# EAGLE board CFO_nano_protoWithDACandOpAmpMCP4822 (EAGLE 9.2.2)
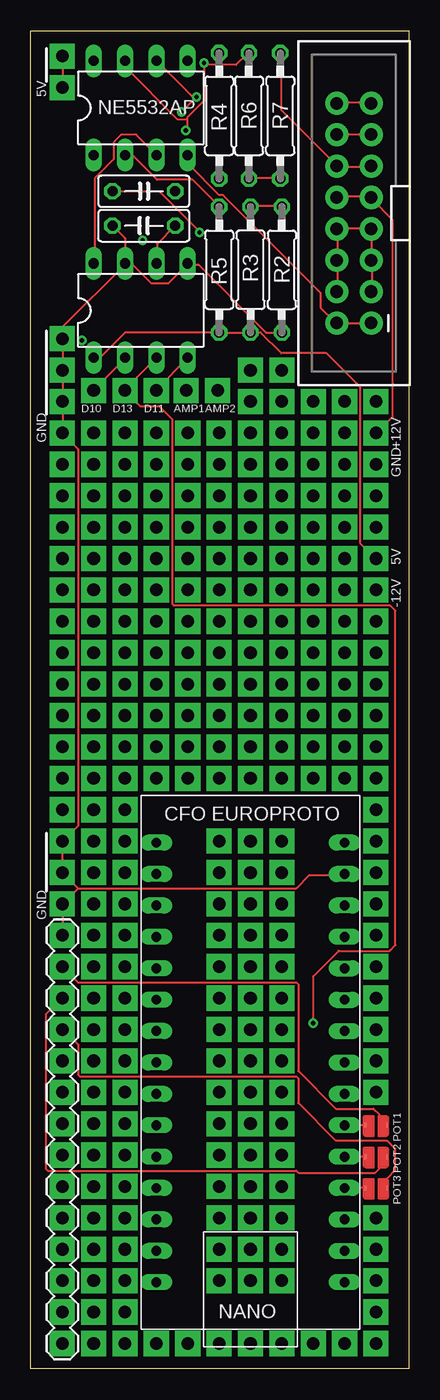
[diagram p0: board, top side]
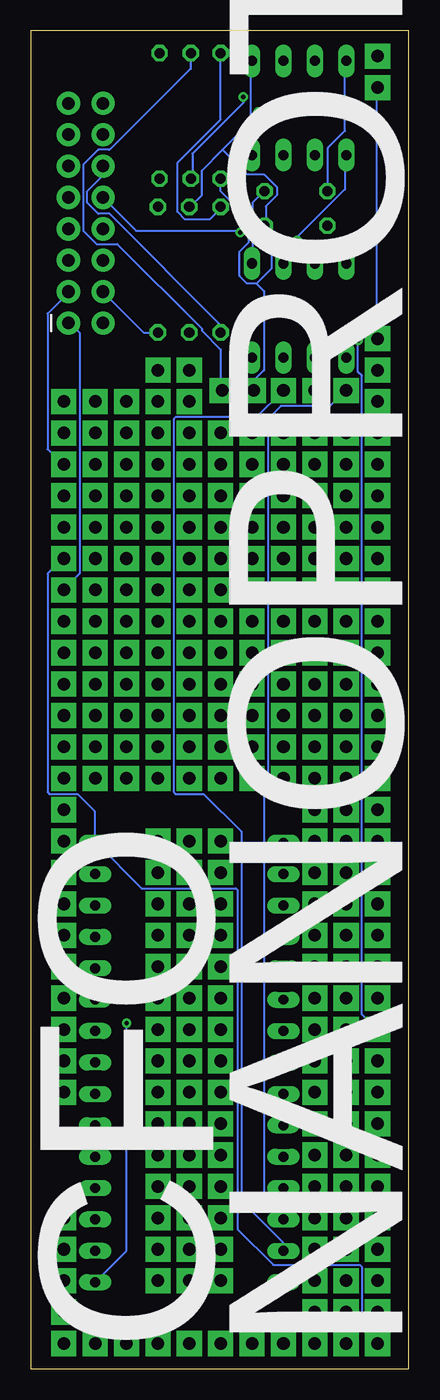
[diagram p1: board, bottom side, seen from below]

Size 30.61 x 108.22 mm. Coordinates in mm from the lower left corner, seen from the top.
Outline: 30.61,0 0,0 0,108.22 30.61,108.22 30.61,0
Copper layers (1*16): Top 0.035mm / dielectric 1.5mm / Bottom 0.035mm
Design rules "default": minimum track width 6mil, minimum drill 0.35mm, track to track 6mil, track to pad 6mil, pad to pad 6mil, via to via 6mil, smd to smd 6mil, copper to edge 40mil, drill to drill 6mil, minimum pad ring 10mil, minimum via ring 8mil, stop-mask expansion 4mil, vias tented up to drill 0mil, thermal gap 10mil

## Footprints (pad centres in the part's own frame; a part is rotated, then mirrored left to right if it is on the bottom)
C050-025X075 = drill 0.813 octagon: 1 -2.54,0; 2 2.54,0
1X01 = drill 1.016 pad 2.032 square: 1 0,0
1X04 = drill 1.016 pad 2.032 square: 1 0,0; 2 2.54,0; 3 5.08,0; 4 7.62,0
1X14 = drill 1.016 pad 2.032 square: 1 0,0; 2 2.54,0; 3 5.08,0; 4 7.62,0; 5 10.16,0; 6 12.7,0; 7 15.24,0; 8 17.78,0; 9 20.32,0; 10 22.86,0; 11 25.4,0; 12 27.94,0; 13 30.48,0; 14 33.02,0
2X8-SHROUDED_LOCK = drill 1.016 pad 1.88: 1 -1.397,8.89; 2 1.397,8.89; 3 -1.397,6.35; 4 1.397,6.35; 5 -1.397,3.81; 6 1.397,3.81; 7 -1.397,1.27; 8 1.397,1.27; 9 -1.397,-1.27; 10 1.397,-1.27; 11 -1.397,-3.81; 12 1.397,-3.81; 13 -1.397,-6.35; 14 1.397,-6.35; 15 -1.397,-8.89; 16 1.397,-8.89
DIL08 = drill 0.813 long: 1 -3.81,-3.81; 2 -1.27,-3.81; 3 1.27,-3.81; 4 3.81,-3.81; 5 3.81,3.81; 6 1.27,3.81; 7 -1.27,3.81; 8 -3.81,3.81
SMT-JUMPER_2_NO_NO-SILK_ROUND = smd 0.152 x 0.305: 1 -0.889,0; 2 0.889,0
0207/10 = drill 0.813 octagon: 1 -5.08,0; 2 5.08,0
NANO = drill 0.8 long: 3.3V -7.62,15.24; 5V -7.62,-10.16; A0 -7.62,10.16; A1 -7.62,7.62; A2 -7.62,5.08; A3 -7.62,2.54; A4 -7.62,0; A5 -7.62,-2.54; A6 -7.62,-5.08; A7 -7.62,-7.62; AREF -7.62,12.7; D2 7.62,-7.62; D3 7.62,-5.08; D4 7.62,-2.54; D5 7.62,0; D6 7.62,2.54; D7 7.62,5.08; D8 7.62,7.62; D9 7.62,10.16; D10 7.62,12.7; D11 7.62,15.24; D12 7.62,17.78; D13 -7.62,17.78; GND -7.62,-15.24; GND1 7.62,-10.16; RST -7.62,-12.7; RST1 7.62,-12.7; RX0 7.62,-15.24; TX1 7.62,-17.78; VIN -7.62,-17.78

## Placement (x,y rotation side)
C5  100n  [C050-025X075]  9.14,92.46 180 top
C6  100n  [C050-025X075]  9.14,95.25 0 top
CVOUT1  [1X01]  12.57,79.12 0 top
CVOUT2  [1X01]  15.11,79.12 0 top
D1  [1X01]  27.94,62.99 0 top
D2  [1X01]  27.94,75.69 0 top
D10  [1X01]  5.08,79.12 0 top
D11  [1X01]  10.16,79.12 0 top
D13  [1X01]  7.62,79.12 0 top
J1  [1X04]  27.94,73.15 270 top
J2  [1X14]  2.54,35.05 270 top
J3  [2X8-SHROUDED_LOCK]  26.16,93.47 180 top
J4  [1X01]  2.54,106.17 0 top
J5  [1X01]  2.54,103.63 0 top
J28  [1X01]  2.54,83.31 0 top
J29  [1X01]  2.54,42.67 0 top
J31  [1X01]  2.54,80.77 0 top
J34  [1X01]  2.54,78.23 0 top
J37  [1X01]  2.54,75.69 0 top
J39  [1X01]  2.54,40.13 0 top
J42  [1X01]  2.54,37.59 0 top
NE5532AP  [DIL08]  8.89,101.98 0 top
POT1  JUMPERCFO  [SMT-JUMPER_2_NO_NO-SILK_ROUND]  27.94,19.68 180 top
POT2  JUMPERCFO  [SMT-JUMPER_2_NO_NO-SILK_ROUND]  27.94,17.14 180 top
POT3  JUMPERCFO  [SMT-JUMPER_2_NO_NO-SILK_ROUND]  27.94,14.61 180 top
R2  10k  [0207/10]  20.32,88.9 270 top
R3  10k  [0207/10]  17.78,88.9 90 top
R4  10k  [0207/10]  15.24,101.35 270 top
R5  10k  [0207/10]  15.24,88.9 270 top
R6  10k  [0207/10]  17.65,101.35 270 top
R7  10k  [0207/10]  20.19,101.35 270 top
U$1  MCP4921  [DIL08]  8.89,85.6 0 top
U$2  NANO  [NANO]  17.78,24.77 180 top

## Library data of the parts
C5 C6 = rcl; SPICEPREFIX: C
CVOUT1 CVOUT2 D1 D2 D10 D11 D13 J3-J5 J28 J29 J31 J34 J37 J39 J42 POT1-POT3 U$2 = CFO
J1 = CFO; PROD_ID: CONN-09696; SPICEPREFIX: E
J2 = CFO; SPICEPREFIX: X
NE5532AP = ic-package
R2-R7 = rcl; SPICEPREFIX: R
U$1 = adafruit

## Nets
5V: J1.4 J2.14 J3.11 J3.12 J4.1 J5.1 R3.1 R5.2 R7.1 U$1.1 U$2.VIN
12V: C6.1 D2.1 J3.9 J3.10 NE5532AP.8
A0: POT3.2 U$2.A0
A1: POT2.2 U$2.A1
A2: POT1.2 U$2.A2
CV: J3.13 J3.14
CV1: NE5532AP.3 U$1.8
CV2: C5.1 NE5532AP.5 R2.1 R3.2 U$1.6
CVOUT1: CVOUT1.1 NE5532AP.1 R4.2
CVOUT2: CVOUT2.1 NE5532AP.7 R6.1
D10: D10.1 U$1.2 U$2.D10
D11: D11.1 U$1.4 U$2.D11
D13: D13.1 U$1.3 U$2.D13
GATE: J3.15 J3.16
GND: C5.2 C6.2 J1.1 J2.1 J3.3 J3.4 J3.5 J3.6 J3.7 J3.8 J28.1 J29.1 J31.1 J34.1 J37.1 J39.1 J42.1 R2.2 U$1.5 U$1.7 U$2.GND
N$2: NE5532AP.6 R6.2 R7.2
N$4: NE5532AP.2 R4.1 R5.1
N$185: J1.3
N$186: J1.2
POT1: J2.2 POT1.1
POT2: J2.3 POT2.1
POT3: J2.4 POT3.1
VEE: D1.1 J3.1 J3.2 NE5532AP.4

## Tracks (layer width: path | path; a pad name or v marks a point on that pad's centre or on a via)
5V
  Top 0.152: R7.1 20.27,106.38 20.27,101.8 24.69,97.38 J3.12 24.84,97.23 27.43,97.23 J3.11 | J5.1 2.59,103.63 2.59,106.07 J4.1 | U$1.1 5.18,81.84 5.64,81.84 7.62,83.82 R5.2 R3.1 18.59,83.82 20.27,82.14 23.93,82.14 26.67,79.4 26.67,66.75 27.89,65.53 J1.4
  Bottom 0.152: J5.1 2.59,103.63 2.59,85.65 5.03,83.21 5.03,81.84 U$1.1 | R5.2 15.24,84.43 24.23,93.42 25.15,93.42 26.06,94.34 26.06,95.25 24.84,96.47 24.84,97.23 J3.12 | J1.4 28.04,65.53 29.26,64.31 29.26,46.63 29.11,46.48 26.82,46.48 25.45,45.11 25.45,42.67 U$2.VIN 25.3,42.52 21.64,38.86 14.02,38.86 13.87,38.71 13.87,11.28 10.97,8.38 3.96,8.38 3.81,8.23 3.81,3.35 2.59,2.13 J2.14
12V  (via drill 0.35)
  Top 0.152: C6.1 10.36,95.25 13.56,92.05 v13.65,91.92 | J3.10 24.84,94.79 27.43,94.79 J3.9 27.58,94.64 29.26,92.96 29.26,76.96 28.04,75.74 D2.1
  Bottom 0.152: NE5532AP.8 5.18,105.77 5.18,100.13 6.55,98.75 6.55,95.25 C6.1 | v13.65,91.92 13.72,92.05 22.1,92.05 24.69,94.64 J3.10
A0
  Top 0.152: POT3.2 U$2.A0
A1
  Top 0.152: POT2.2 U$2.A1
A2
  Top 0.152: POT1.2 U$2.A2
CV
  Top 0.152: J3.13 J3.14
CV1
  Top 0.152: U$1.8 5.18,89.46 5.18,96.32 6.71,97.84 6.71,99.21 7.32,99.82 8.53,99.82 10.06,98.3 NE5532AP.3
CV2
  Top 0.152: C5.1 10.21,90.98 10.21,89.46 U$1.6 | R3.2 17.83,94.03 20.27,94.03 R2.1
  Bottom 0.152: 15.09,98.6 16.76,96.93 16.76,94.94 17.68,94.03 R3.2 | 15.09,98.6 12.8,100.89 12.8,105.77 NE5532AP.5 | 15.09,98.6 13.11,96.62 11.73,96.62 10.67,95.56 10.67,94.94 11.58,94.03 11.58,92.51 C5.1
CVOUT1  (via drill 0.35)
  Bottom 0.152: NE5532AP.1 5.18,98.15 5.18,95.4 8.99,91.59 8.99,91.29 v9.05,91.28 9.14,91.14 10.36,91.14 11.12,90.37 11.12,89 12.34,87.78 | R4.2 15.24,95.25 12.95,92.96 12.95,91.14 13.72,90.37 13.72,88.39 13.11,87.78 12.34,87.78 | 12.34,87.78 11.73,87.17 11.73,80.77 12.5,80.01 12.5,79.25 CVOUT1.1
CVOUT2  (via drill 0.35)
  Top 0.152: 12.65,101.04 12.65,101.19 14.02,102.56 14.02,105.46 | 12.65,101.04 12.65,100.28 v12.54,100.17 | 14.02,105.46 16.61,105.46 17.53,106.38 R6.1 | 14.02,105.46 v14.02,105.61 | NE5532AP.7 7.62,105.31 11.89,101.04 12.65,101.04
  Bottom 0.152: CVOUT2.1 15.24,79.25 15.24,82.45 16.76,83.97 16.76,84.12 23.62,90.98 25.3,90.98 26.36,92.05 26.36,97.38 25.15,98.6 24.23,98.6 17.68,105.16 17.68,106.38 R6.1
D10
  Top 0.152: U$1.2 7.62,81.69 5.18,79.25 D10.1
  Bottom 0.152: U$2.D10 10.21,12.19 10.21,12.65 11.73,14.17 11.73,46.33 11.43,46.63 11.43,76.81 10.36,77.88 6.4,77.88 5.18,79.1 D10.1
D11
  Top 0.152: U$1.4 12.65,81.69 10.21,79.25 D11.1
  Bottom 0.152: U$2.D11 10.21,9.6 10.21,10.21 13.56,13.56 13.56,43.43 16.61,46.48 18.9,46.48 19.05,46.63 19.05,76.81 18.9,76.96 12.34,76.96 10.21,79.1 D11.1
D13  (via drill 0.35)
  Top 0.152: U$1.3 7.62,79.25 D13.1 7.62,79.1 8.84,77.88 10.36,77.88 11.43,76.81 11.43,61.87 11.58,61.72 29.11,61.72 29.51,61.32 29.51,34.27 29.05,33.81 24.92,33.81 22.86,31.75 v22.86,27.94
  Bottom 0.152: U$2.D13 22.86,9.53 v22.86,27.94
GATE
  Top 0.152: J3.16 24.84,102.41 27.43,102.41 J3.15
GND
  Top 0.152: J2.1 2.59,35.05 2.59,37.49 J42.1 3.81,38.86 | 3.81,38.86 21.49,38.86 22.55,39.93 25.3,39.93 U$2.GND | 3.81,38.86 J39.1 2.59,40.23 2.59,42.67 | J3.4 24.84,87.17 24.84,89.61 J3.6 24.84,89.76 24.84,92.2 | J3.3 27.58,87.17 27.58,89.61 J3.5 27.58,89.76 27.58,92.2 J3.7 24.84,92.2 | 24.84,92.2 J3.8 | 2.59,80.77 2.59,83.21 J28.1 2.59,83.36 2.59,84.28 7.62,89.31 | 2.59,80.77 2.59,78.33 J34.1 2.59,78.18 2.59,75.74 J37.1 2.59,75.59 3.81,74.37 3.81,43.89 2.59,42.67 | 2.59,80.77 J31.1 | C5.2 7.62,91.44 U$1.7 7.62,89.31 | 7.62,89.31 8.23,89.31 9.75,87.78 11.12,87.78 12.65,89.31 U$1.5 12.8,89.31 13.56,89.31 19.05,83.82 R2.2 | 2.59,42.67 J29.1
  Bottom 0.152: R2.2 21.49,83.82 24.69,87.02 J3.4 | J1.1 28.04,73.15 29.26,74.37 29.26,85.34 27.58,87.02 J3.3 | U$1.5 12.65,89.46 12.65,94.34 11.73,95.25 C6.2
N$1  (via drill 1.02 pad 2.03)
  other vias: 27.94,50.29
N$2  (via drill 0.35)
  Top 0.152: R6.2 17.68,96.32 20.12,96.32 R7.2 | 13.26,102.72 v12.19,101.65 | 13.26,102.72 10.21,105.77 NE5532AP.6 | 13.26,102.72 v13.41,102.87
  Bottom 0.152: v13.41,102.87 13.41,102.41 17.53,98.3 17.53,96.32 R6.2
N$3  (via drill 1.02 pad 2.03)
  other vias: 5.08,2.03
N$4
  Top 0.152: NE5532AP.2 7.62,98.15 8.23,98.15 10.21,96.16 13.11,96.16 15.24,94.03 R5.1
  Bottom 0.152: R4.1 15.24,101.04 18.75,97.54 18.75,93.57 18.14,92.96 16.15,92.96 15.24,93.88 R5.1
N$5  (via drill 1.02 pad 2.03)
  other vias: 7.62,2.03
N$6  (via drill 1.02 pad 2.03)
  other vias: 10.16,2.03
N$7  (via drill 1.02 pad 2.03)
  other vias: 10.16,47.75
N$8  (via drill 1.02 pad 2.03)
  other vias: 7.62,4.57
N$9  (via drill 1.02 pad 2.03)
  other vias: 27.94,47.75
N$10  (via drill 1.02 pad 2.03)
  other vias: 5.08,4.57
N$11  (via drill 1.02 pad 2.03)
  other vias: 5.08,7.11
N$12  (via drill 1.02 pad 2.03)
  other vias: 7.62,7.11
N$13  (via drill 1.02 pad 2.03)
  other vias: 10.16,50.29
N$14  (via drill 1.02 pad 2.03)
  other vias: 10.16,52.83
N$15  (via drill 1.02 pad 2.03)
  other vias: 7.62,9.65
N$16  (via drill 1.02 pad 2.03)
  other vias: 5.08,9.65
N$17  (via drill 1.02 pad 2.03)
  other vias: 5.08,12.19
N$18  (via drill 1.02 pad 2.03)
  other vias: 7.62,12.19
N$19  (via drill 1.02 pad 2.03)
  other vias: 10.16,55.37
N$20  (via drill 1.02 pad 2.03)
  other vias: 10.16,57.91
N$21  (via drill 1.02 pad 2.03)
  other vias: 7.62,14.73
N$22  (via drill 1.02 pad 2.03)
  other vias: 5.08,14.73
N$23  (via drill 1.02 pad 2.03)
  other vias: 5.08,17.27
N$24  (via drill 1.02 pad 2.03)
  other vias: 7.62,17.27
N$25  (via drill 1.02 pad 2.03)
  other vias: 10.16,60.45
N$27  (via drill 1.02 pad 2.03)
  other vias: 7.62,19.81
N$28  (via drill 1.02 pad 2.03)
  other vias: 5.08,19.81
N$29  (via drill 1.02 pad 2.03)
  other vias: 5.08,22.35
N$30  (via drill 1.02 pad 2.03)
  other vias: 7.62,22.35
N$33  (via drill 1.02 pad 2.03)
  other vias: 7.62,24.89
N$34  (via drill 1.02 pad 2.03)
  other vias: 5.08,24.89
N$35  (via drill 1.02 pad 2.03)
  other vias: 5.08,27.43
N$36  (via drill 1.02 pad 2.03)
  other vias: 7.62,27.43
N$39  (via drill 1.02 pad 2.03)
  other vias: 7.62,29.97
N$40  (via drill 1.02 pad 2.03)
  other vias: 5.08,29.97
N$41  (via drill 1.02 pad 2.03)
  other vias: 5.08,32.51
N$42  (via drill 1.02 pad 2.03)
  other vias: 7.62,32.51
N$45  (via drill 1.02 pad 2.03)
  other vias: 7.62,35.05
N$46  (via drill 1.02 pad 2.03)
  other vias: 5.08,35.05
N$47  (via drill 1.02 pad 2.03)
  other vias: 5.08,37.59
N$48  (via drill 1.02 pad 2.03)
  other vias: 7.62,37.59
N$51  (via drill 1.02 pad 2.03)
  other vias: 7.62,40.13
N$52  (via drill 1.02 pad 2.03)
  other vias: 5.08,40.13
N$53  (via drill 1.02 pad 2.03)
  other vias: 5.08,42.67
N$54  (via drill 1.02 pad 2.03)
  other vias: 7.62,42.67
N$57  (via drill 1.02 pad 2.03)
  other vias: 7.62,45.21
N$58  (via drill 1.02 pad 2.03)
  other vias: 5.08,45.21
N$59  (via drill 1.02 pad 2.03)
  other vias: 2.54,45.21
N$60  (via drill 1.02 pad 2.03)
  other vias: 2.54,47.75
N$61  (via drill 1.02 pad 2.03)
  other vias: 5.08,47.75
N$62  (via drill 1.02 pad 2.03)
  other vias: 7.62,47.75
N$65  (via drill 1.02 pad 2.03)
  other vias: 7.62,50.29
N$66  (via drill 1.02 pad 2.03)
  other vias: 5.08,50.29
N$67  (via drill 1.02 pad 2.03)
  other vias: 2.54,50.29
N$68  (via drill 1.02 pad 2.03)
  other vias: 22.86,60.45
N$69  (via drill 1.02 pad 2.03)
  other vias: 22.86,57.91
N$70  (via drill 1.02 pad 2.03)
  other vias: 25.4,57.91
N$71  (via drill 1.02 pad 2.03)
  other vias: 25.4,60.45
N$83  (via drill 1.02 pad 2.03)
  other vias: 5.08,75.69
N$88  (via drill 1.02 pad 2.03)
  other vias: 27.94,22.35
N$93  (via drill 1.02 pad 2.03)
  other vias: 27.94,24.89
N$94  (via drill 1.02 pad 2.03)
  other vias: 27.94,27.43
N$99  (via drill 1.02 pad 2.03)
  other vias: 27.94,29.97
N$100  (via drill 1.02 pad 2.03)
  other vias: 27.94,32.51
N$105  (via drill 1.02 pad 2.03)
  other vias: 27.94,35.05
N$106  (via drill 1.02 pad 2.03)
  other vias: 25.4,55.37
N$107  (via drill 1.02 pad 2.03)
  other vias: 25.4,52.83
N$108  (via drill 1.02 pad 2.03)
  other vias: 12.7,60.45
N$109  (via drill 1.02 pad 2.03)
  other vias: 15.24,60.45
N$110  (via drill 1.02 pad 2.03)
  other vias: 17.78,60.45
N$112  (via drill 1.02 pad 2.03)
  other vias: 15.24,35.05
N$113  (via drill 1.02 pad 2.03)
  other vias: 17.78,35.05
N$114  (via drill 1.02 pad 2.03)
  other vias: 20.32,35.05
N$115  (via drill 1.02 pad 2.03)
  other vias: 20.32,32.51
N$116  (via drill 1.02 pad 2.03)
  other vias: 17.78,32.51
N$117  (via drill 1.02 pad 2.03)
  other vias: 15.24,32.51
N$119  (via drill 1.02 pad 2.03)
  other vias: 17.78,57.91
N$120  (via drill 1.02 pad 2.03)
  other vias: 15.24,57.91
N$121  (via drill 1.02 pad 2.03)
  other vias: 12.7,57.91
N$122  (via drill 1.02 pad 2.03)
  other vias: 12.7,55.37
N$123  (via drill 1.02 pad 2.03)
  other vias: 15.24,55.37
N$124  (via drill 1.02 pad 2.03)
  other vias: 17.78,55.37
N$126  (via drill 1.02 pad 2.03)
  other vias: 15.24,29.97
N$127  (via drill 1.02 pad 2.03)
  other vias: 17.78,29.97
N$128  (via drill 1.02 pad 2.03)
  other vias: 20.32,29.97
N$130  (via drill 1.02 pad 2.03)
  other vias: 12.7,50.29
N$131  (via drill 1.02 pad 2.03)
  other vias: 12.7,52.83
N$133  (via drill 1.02 pad 2.03)
  other vias: 15.24,52.83
N$134  (via drill 1.02 pad 2.03)
  other vias: 17.78,52.83
N$136  (via drill 1.02 pad 2.03)
  other vias: 15.24,27.43
N$137  (via drill 1.02 pad 2.03)
  other vias: 17.78,27.43
N$138  (via drill 1.02 pad 2.03)
  other vias: 20.32,27.43
N$139  (via drill 1.02 pad 2.03)
  other vias: 20.32,24.89
N$140  (via drill 1.02 pad 2.03)
  other vias: 17.78,24.89
N$141  (via drill 1.02 pad 2.03)
  other vias: 15.24,24.89
N$143  (via drill 1.02 pad 2.03)
  other vias: 17.78,50.29
N$144  (via drill 1.02 pad 2.03)
  other vias: 15.24,50.29
N$145  (via drill 1.02 pad 2.03)
  other vias: 27.94,9.65
N$146  (via drill 1.02 pad 2.03)
  other vias: 27.94,12.19
N$147  (via drill 1.02 pad 2.03)
  other vias: 12.7,47.75
N$148  (via drill 1.02 pad 2.03)
  other vias: 15.24,47.75
N$149  (via drill 1.02 pad 2.03)
  other vias: 17.78,47.75
N$151  (via drill 1.02 pad 2.03)
  other vias: 15.24,22.35
N$152  (via drill 1.02 pad 2.03)
  other vias: 17.78,22.35
N$153  (via drill 1.02 pad 2.03)
  other vias: 20.32,22.35
N$154  (via drill 1.02 pad 2.03)
  other vias: 20.32,19.81
N$155  (via drill 1.02 pad 2.03)
  other vias: 17.78,19.81
N$156  (via drill 1.02 pad 2.03)
  other vias: 15.24,19.81
N$158  (via drill 1.02 pad 2.03)
  other vias: 17.78,2.03
N$159  (via drill 1.02 pad 2.03)
  other vias: 15.24,2.03
N$160  (via drill 1.02 pad 2.03)
  other vias: 12.7,2.03
N$161  (via drill 1.02 pad 2.03)
  other vias: 27.94,7.11
N$162  (via drill 1.02 pad 2.03)
  other vias: 27.94,4.57
N$163  (via drill 1.02 pad 2.03)
  other vias: 20.32,50.29
N$164  (via drill 1.02 pad 2.03)
  other vias: 22.86,50.29
N$165  (via drill 1.02 pad 2.03)
  other vias: 25.4,50.29
N$167  (via drill 1.02 pad 2.03)
  other vias: 15.24,17.27
N$168  (via drill 1.02 pad 2.03)
  other vias: 17.78,17.27
N$169  (via drill 1.02 pad 2.03)
  other vias: 20.32,17.27
N$170  (via drill 1.02 pad 2.03)
  other vias: 20.32,14.73
N$171  (via drill 1.02 pad 2.03)
  other vias: 17.78,14.73
N$172  (via drill 1.02 pad 2.03)
  other vias: 15.24,14.73
N$174  (via drill 1.02 pad 2.03)
  other vias: 25.4,47.75
N$175  (via drill 1.02 pad 2.03)
  other vias: 22.86,47.75
N$176  (via drill 1.02 pad 2.03)
  other vias: 20.32,47.75
N$177  (via drill 1.02 pad 2.03)
  other vias: 27.94,60.45
N$178  (via drill 1.02 pad 2.03)
  other vias: 20.32,2.03
N$179  (via drill 1.02 pad 2.03)
  other vias: 22.86,2.03
N$180  (via drill 1.02 pad 2.03)
  other vias: 25.4,2.03
N$182  (via drill 1.02 pad 2.03)
  other vias: 15.24,12.19
N$183  (via drill 1.02 pad 2.03)
  other vias: 17.78,12.19
N$184  (via drill 1.02 pad 2.03)
  other vias: 20.32,12.19
N$187  (via drill 1.02 pad 2.03)
  other vias: 20.32,9.65
N$188  (via drill 1.02 pad 2.03)
  other vias: 17.78,9.65
N$189  (via drill 1.02 pad 2.03)
  other vias: 15.24,9.65
N$191  (via drill 1.02 pad 2.03)
  other vias: 20.32,55.37
N$192  (via drill 1.02 pad 2.03)
  other vias: 20.32,57.91
N$193  (via drill 1.02 pad 2.03)
  other vias: 20.32,60.45
N$194  (via drill 1.02 pad 2.03)
  other vias: 27.94,55.37
N$195  (via drill 1.02 pad 2.03)
  other vias: 22.86,52.83
N$196  (via drill 1.02 pad 2.03)
  other vias: 20.32,52.83
N$198  (via drill 1.02 pad 2.03)
  other vias: 15.24,7.11
N$199  (via drill 1.02 pad 2.03)
  other vias: 17.78,7.11
N$200  (via drill 1.02 pad 2.03)
  other vias: 20.32,7.11
N$201  (via drill 1.02 pad 2.03)
  other vias: 7.62,75.69
N$202  (via drill 1.02 pad 2.03)
  other vias: 10.16,75.69
N$203  (via drill 1.02 pad 2.03)
  other vias: 12.7,75.69
N$204  (via drill 1.02 pad 2.03)
  other vias: 15.24,75.69
N$205  (via drill 1.02 pad 2.03)
  other vias: 17.78,75.69
N$206  (via drill 1.02 pad 2.03)
  other vias: 20.32,75.69
N$211  (via drill 1.02 pad 2.03)
  other vias: 22.86,55.37
N$212  (via drill 1.02 pad 2.03)
  other vias: 27.94,52.83
N$213  (via drill 1.02 pad 2.03)
  other vias: 27.94,57.91
N$214  (via drill 1.02 pad 2.03)
  other vias: 27.94,2.03
N$215  (via drill 1.02 pad 2.03)
  other vias: 2.54,52.83
N$216  (via drill 1.02 pad 2.03)
  other vias: 5.08,52.83
N$217  (via drill 1.02 pad 2.03)
  other vias: 7.62,52.83
N$220  (via drill 1.02 pad 2.03)
  other vias: 15.24,37.59
N$221  (via drill 1.02 pad 2.03)
  other vias: 17.78,37.59
N$222  (via drill 1.02 pad 2.03)
  other vias: 20.32,37.59
N$225  (via drill 1.02 pad 2.03)
  other vias: 27.94,37.59
N$226  (via drill 1.02 pad 2.03)
  other vias: 27.94,40.13
N$227  (via drill 1.02 pad 2.03)
  other vias: 27.94,42.67
N$228  (via drill 1.02 pad 2.03)
  other vias: 27.94,45.21
N$229  (via drill 1.02 pad 2.03)
  other vias: 22.86,75.69
N$230  (via drill 1.02 pad 2.03)
  other vias: 25.4,62.99
N$236  (via drill 1.02 pad 2.03)
  other vias: 22.86,62.99
N$237  (via drill 1.02 pad 2.03)
  other vias: 17.78,62.99
N$239  (via drill 1.02 pad 2.03)
  other vias: 20.32,62.99
N$240  (via drill 1.02 pad 2.03)
  other vias: 20.32,42.67
N$241  (via drill 1.02 pad 2.03)
  other vias: 20.32,40.13
N$243  (via drill 1.02 pad 2.03)
  other vias: 17.78,40.13
N$244  (via drill 1.02 pad 2.03)
  other vias: 17.78,42.67
N$246  (via drill 1.02 pad 2.03)
  other vias: 15.24,62.99
N$248  (via drill 1.02 pad 2.03)
  other vias: 15.24,42.67
N$249  (via drill 1.02 pad 2.03)
  other vias: 15.24,40.13
N$253  (via drill 1.02 pad 2.03)
  other vias: 12.7,62.99
N$254  (via drill 1.02 pad 2.03)
  other vias: 10.16,62.99
N$258  (via drill 1.02 pad 2.03)
  other vias: 7.62,55.37
N$259  (via drill 1.02 pad 2.03)
  other vias: 7.62,57.91
N$260  (via drill 1.02 pad 2.03)
  other vias: 7.62,60.45
N$261  (via drill 1.02 pad 2.03)
  other vias: 7.62,62.99
N$262  (via drill 1.02 pad 2.03)
  other vias: 5.08,62.99
N$263  (via drill 1.02 pad 2.03)
  other vias: 5.08,57.91
N$264  (via drill 1.02 pad 2.03)
  other vias: 5.08,55.37
N$265  (via drill 1.02 pad 2.03)
  other vias: 5.08,60.45
N$266  (via drill 1.02 pad 2.03)
  other vias: 2.54,60.45
N$267  (via drill 1.02 pad 2.03)
  other vias: 2.54,57.91
N$268  (via drill 1.02 pad 2.03)
  other vias: 2.54,55.37
N$269  (via drill 1.02 pad 2.03)
  other vias: 2.54,62.99
N$270  (via drill 1.02 pad 2.03)
  other vias: 2.54,65.53
N$271  (via drill 1.02 pad 2.03)
  other vias: 5.08,65.53
N$272  (via drill 1.02 pad 2.03)
  other vias: 7.62,65.53
N$273  (via drill 1.02 pad 2.03)
  other vias: 10.16,65.53
N$274  (via drill 1.02 pad 2.03)
  other vias: 12.7,65.53
N$275  (via drill 1.02 pad 2.03)
  other vias: 15.24,65.53
N$276  (via drill 1.02 pad 2.03)
  other vias: 17.78,65.53
N$277  (via drill 1.02 pad 2.03)
  other vias: 20.32,65.53
N$278  (via drill 1.02 pad 2.03)
  other vias: 22.86,65.53
N$279  (via drill 1.02 pad 2.03)
  other vias: 25.4,65.53
N$280  (via drill 1.02 pad 2.03)
  other vias: 25.4,68.07
N$281  (via drill 1.02 pad 2.03)
  other vias: 22.86,68.07
N$282  (via drill 1.02 pad 2.03)
  other vias: 20.32,68.07
N$283  (via drill 1.02 pad 2.03)
  other vias: 17.78,68.07
N$284  (via drill 1.02 pad 2.03)
  other vias: 15.24,68.07
N$285  (via drill 1.02 pad 2.03)
  other vias: 12.7,68.07
N$286  (via drill 1.02 pad 2.03)
  other vias: 10.16,68.07
N$287  (via drill 1.02 pad 2.03)
  other vias: 5.08,68.07
N$288  (via drill 1.02 pad 2.03)
  other vias: 7.62,68.07
N$289  (via drill 1.02 pad 2.03)
  other vias: 2.54,68.07
N$290  (via drill 1.02 pad 2.03)
  other vias: 2.54,70.61
N$291  (via drill 1.02 pad 2.03)
  other vias: 2.54,73.15
N$292  (via drill 1.02 pad 2.03)
  other vias: 5.08,73.15
N$293  (via drill 1.02 pad 2.03)
  other vias: 5.08,70.61
N$294  (via drill 1.02 pad 2.03)
  other vias: 7.62,70.61
N$295  (via drill 1.02 pad 2.03)
  other vias: 7.62,73.15
N$296  (via drill 1.02 pad 2.03)
  other vias: 25.4,75.69
N$297  (via drill 1.02 pad 2.03)
  other vias: 27.94,78.23
N$298  (via drill 1.02 pad 2.03)
  other vias: 25.4,78.23
N$299  (via drill 1.02 pad 2.03)
  other vias: 22.86,78.23
N$300  (via drill 1.02 pad 2.03)
  other vias: 20.32,78.23
N$301  (via drill 1.02 pad 2.03)
  other vias: 17.78,78.23
N$302  (via drill 1.02 pad 2.03)
  other vias: 17.78,80.77
N$303  (via drill 1.02 pad 2.03)
  other vias: 20.32,73.15
N$304  (via drill 1.02 pad 2.03)
  other vias: 17.78,73.15
N$305  (via drill 1.02 pad 2.03)
  other vias: 15.24,73.15
N$306  (via drill 1.02 pad 2.03)
  other vias: 12.7,73.15
N$307  (via drill 1.02 pad 2.03)
  other vias: 10.16,73.15
N$308  (via drill 1.02 pad 2.03)
  other vias: 10.16,70.61
N$309  (via drill 1.02 pad 2.03)
  other vias: 12.7,70.61
N$310  (via drill 1.02 pad 2.03)
  other vias: 15.24,70.61
N$311  (via drill 1.02 pad 2.03)
  other vias: 17.78,70.61
N$312  (via drill 1.02 pad 2.03)
  other vias: 20.32,70.61
N$313  (via drill 1.02 pad 2.03)
  other vias: 22.86,70.61
N$314  (via drill 1.02 pad 2.03)
  other vias: 22.86,73.15
N$315  (via drill 1.02 pad 2.03)
  other vias: 25.4,73.15
N$316  (via drill 1.02 pad 2.03)
  other vias: 25.4,70.61
N$317  (via drill 1.02 pad 2.03)
  other vias: 20.32,80.77
POT1
  Top 0.152: J2.2 3.81,31.24 21.49,31.24 21.64,31.09 21.64,24.08 24.69,21.03 27.74,21.03 28.19,20.57 28.19,20.42 28.8,19.81 POT1.1
POT2
  Top 0.152: J2.3 1.22,28.65 1.22,16.15 1.37,16 21.49,16 21.64,15.85 27.89,15.85 28.8,16.76 28.8,17.07 POT2.1
POT3  (via drill 0.35)
  Top 0.152: POT3.1 28.8,14.63 28.8,15.36 29.51,16.07 29.51,17.78 28.85,18.44 24.69,18.44 21.64,21.49 21.64,23.47 21.49,23.62 3.96,23.62 3.81,23.77 3.81,26.21 2.59,27.43 J2.4
  Bottom 0.152: v4.13,83.19 4.12,83.06 4.12,80.62 3.81,80.31 3.81,28.65 2.59,27.43 J2.4
VEE
  Top 0.152: NE5532AP.4 12.8,98.15 12.8,97.38 15.24,94.94 15.54,94.94 23.47,87.02 23.47,85.8 24.69,84.58 J3.2 J3.1
  Bottom 0.152: D1.1 27.89,63.09 26.67,64.31 26.67,83.82 27.43,84.58 J3.1

## Text on the board
tNames: 5V | D10 | D13 | D11 | AMP1 | AMP2 | GND | +12V | GND | 5V | -12V | CFO EUROPROTO | GND | NANO
bNames: CFO / NANOPROTO